# Altium PCB IncuNest_Phototherapy.PcbDoc
Units mm, origin at the board's own origin, x right, y up, seen from the top; angles counter-clockwise.
Board outline 230 x 145 mm, 2 copper layers (Top Layer, Bottom Layer); 100 components, 77 nets, 202 pads, 26 vias.
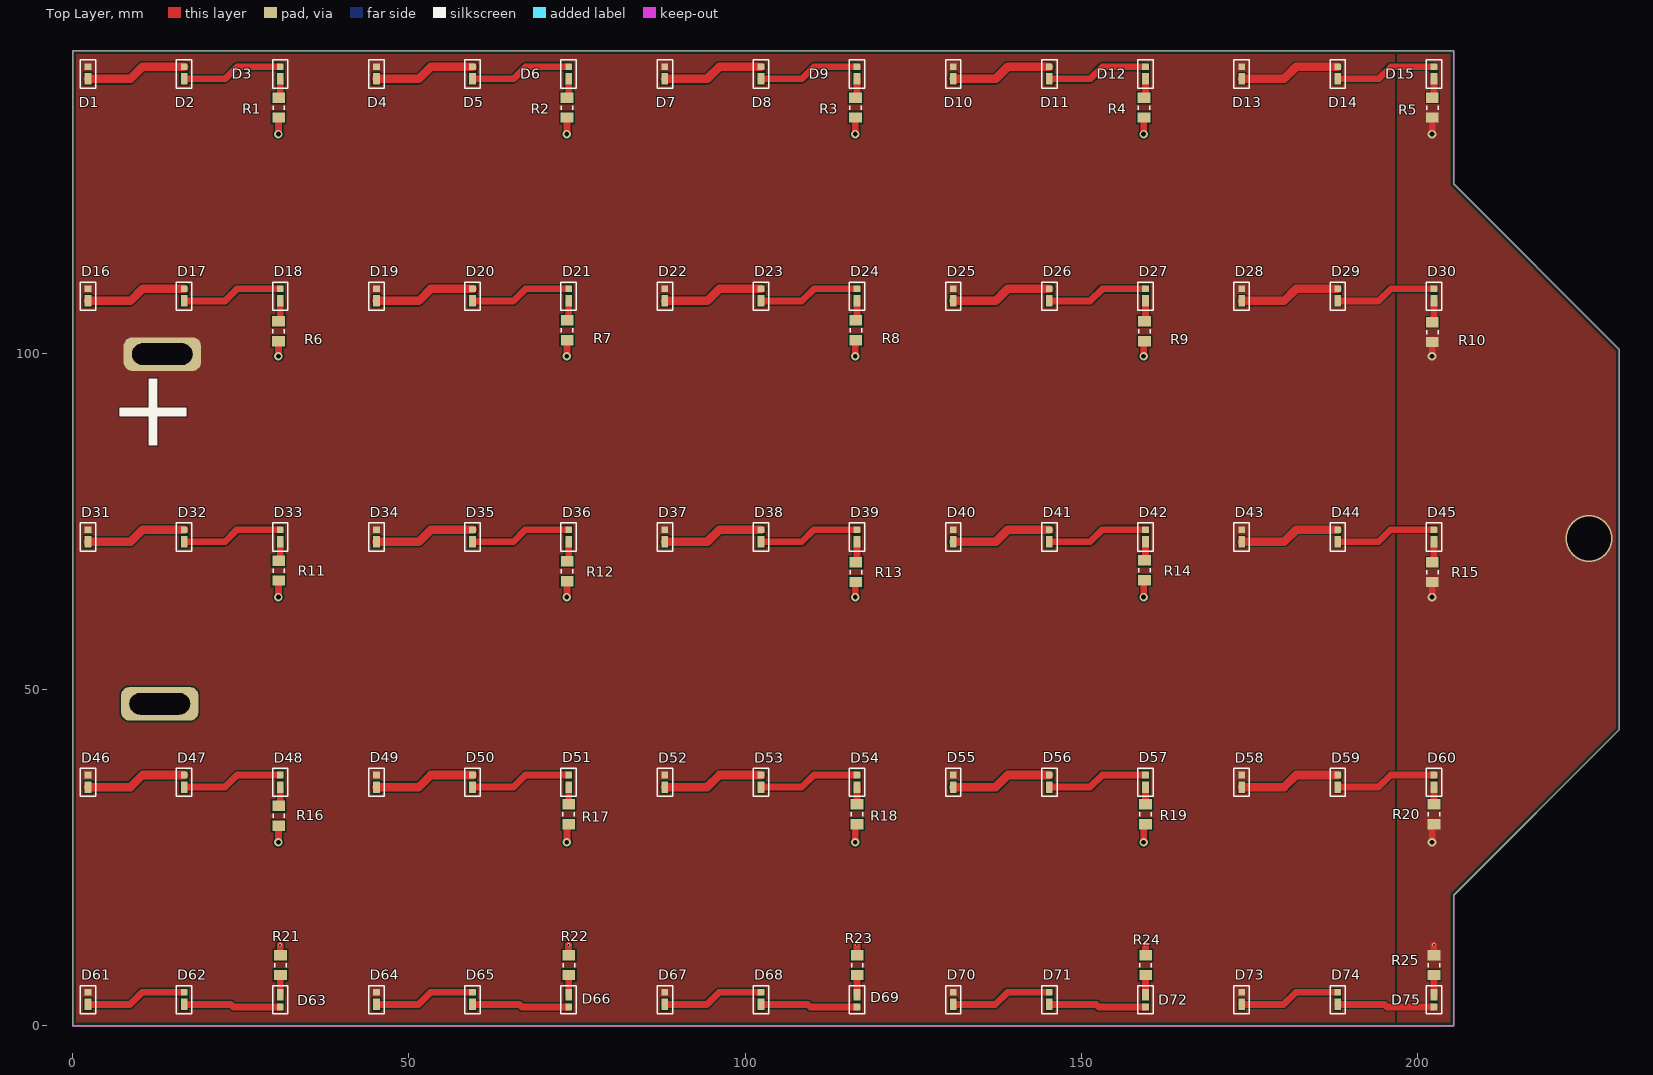
[diagram p0: Top Layer view]
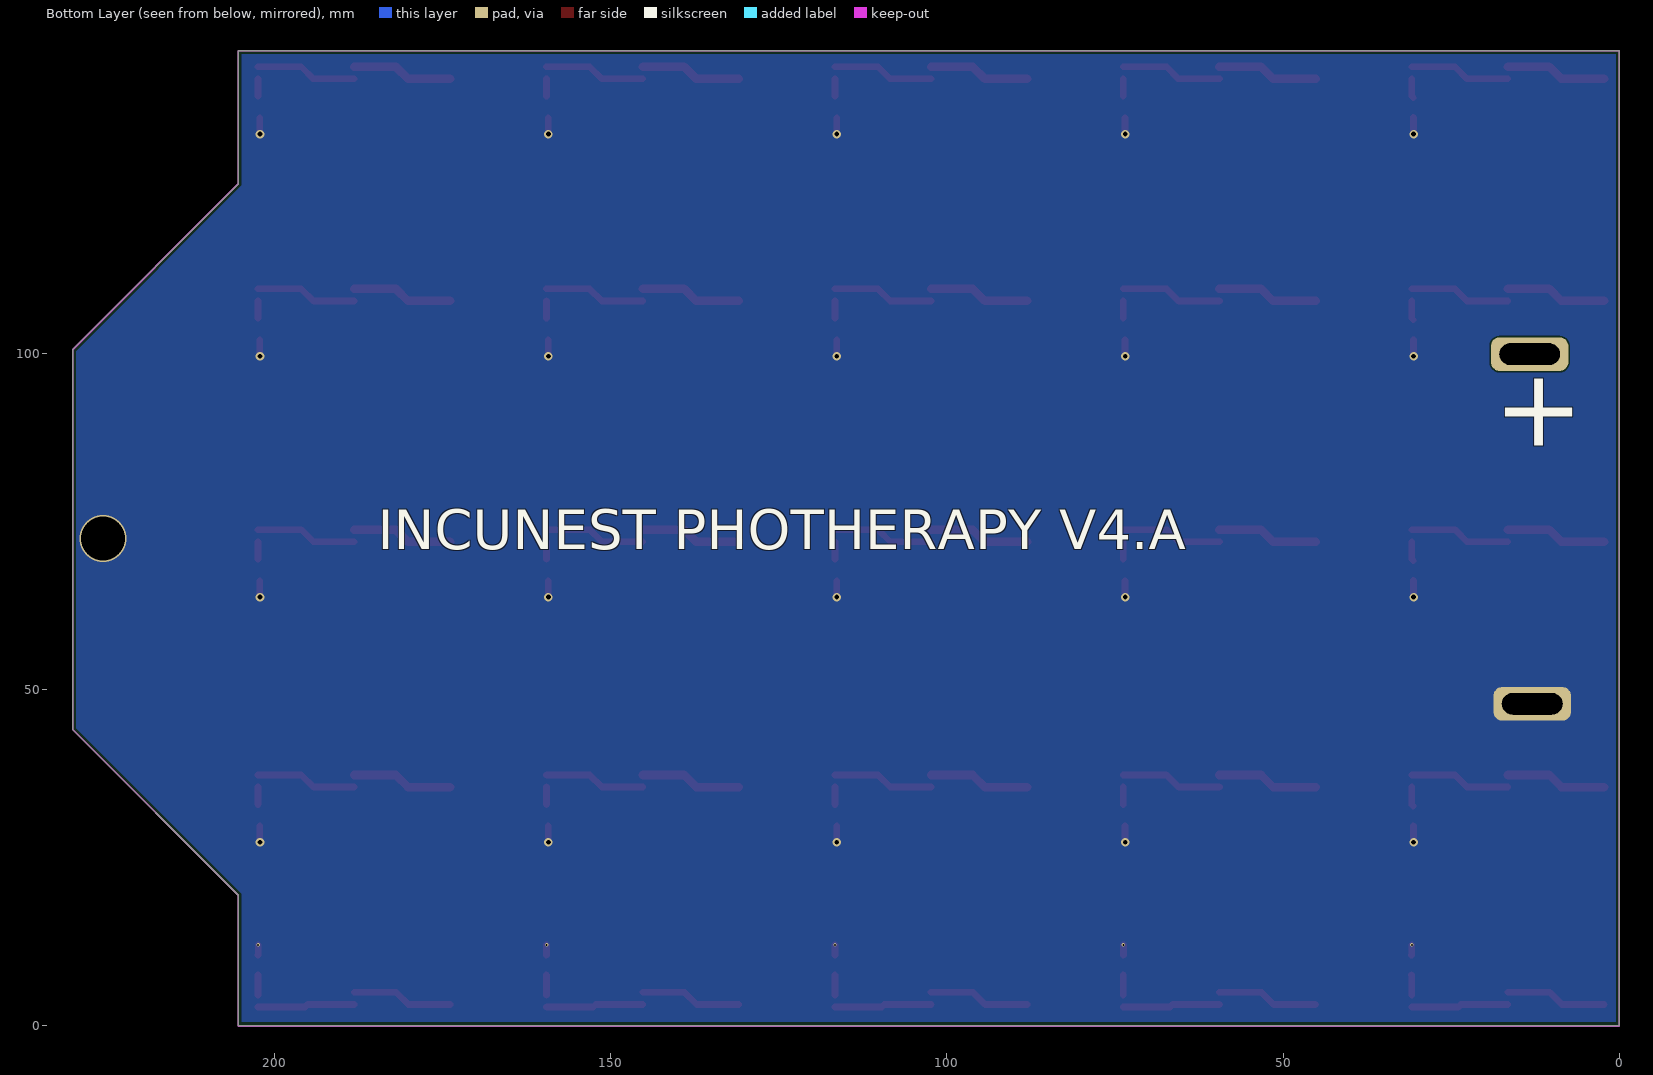
[diagram p1: Bottom Layer view, seen from below]

## Layer stack, top to bottom
Top Solder: solder mask 0.012, FC-001, Dk 4
Top Solder: solder mask 0.0102, Solder Resist, Dk 3.5
Top Layer: signal copper 0.0356
Dielectric 1: dielectric 0.32, FR-4, Dk 4.8
Bottom Layer: signal copper 0.0356
Flex Bottom Coverlay: solder mask 0.0102, Solder Resist, Dk 3.5
Flex Bottom Coverlay: solder mask 0.012, FC-001, Dk 4

## Board outline
0,0 0,145 20.069,145 205.362,145 205.362,125.215 205.362,125.205 230,100.567 230,44.081 205.362,19.443 205.362,0 20.316,0

## Design rules (kind name [scope] priority, off if disabled: settings)
AssemblyTestPointUsage AssemblyTestPointUsage_1 [All] p2:
AssemblyTestpoint AssemblyTestpoint_1 [All] p2: testpointundercomponent=TRUE minsize=1.016 maxsize=2.54 preferedsize=1.524 minholesize=0 maxholesize=1.016 preferedholesize=0.813 testpointgrid=0.025 usegrid=TRUE gridtolerance=0 allowsidetop=TRUE allowsidebottom=TRUE
Clearance "Board outline clearance" [All vs OnLayer('Keep-Out Layer')] p1: gap=0.381 ignorepadtopadclearanceinfootprint=FALSE except(0: Arc-Hole Track-Hole SMDPad-Hole THPad-Hole Via-Hole Fill-Hole Poly-Hole Region-Hole Text-Hole)
Clearance Clearance_1 [All] p2: gap=0.2 ignorepadtopadclearanceinfootprint=FALSE except(0: Arc-Hole Track-Hole SMDPad-Hole THPad-Hole Via-Hole Fill-Hole Poly-Hole Region-Hole Text-Hole; 0.17: SMDPad-SMDPad; 0.254: Track-Via; 0.33: Track-THPad)
ComponentClearance [InComponent('L1')] p1: gap=0 collisioncheckmode=3 verticalgap=0.254 showdistances=FALSE
ComponentClearance UFL [InComponent('RF_CON1')] p2: gap=0 collisioncheckmode=3 verticalgap=0.254 showdistances=FALSE
ComponentClearance ComponentClearance_1 [All] p3: gap=0.254 collisioncheckmode=3 verticalgap=0.254 showdistances=FALSE
DiffPairsRouting [All] p1: maxlimit=0.254 minlimit=0.203 mostfreqgap=0.254 toplayer_minwidth=0.203 toplayer_maxwidth=0.381 toplayer_prefwidth=0.381 bottomlayer_minwidth=0.203 bottomlayer_maxwidth=0.381 bottomlayer_prefwidth=0.381 substack1={523C32A3-E987-4162-AA8D-483919F97A58} toplayer_{523c32a3-e987-4162-aa8d-483919f97a58}_minwidth=0.381 toplayer_{523c32a3-e987-4162-aa8d-483919f97a58}_maxwidth=0.381 toplayer_{523c32a3-e987-4162-aa8d-483919f97a58}_prefwidth=0.381 bottomlayer_{523c32a3-e987-4162-aa8d-483919f97a58}_minwidth=0.381 bottomlayer_{523c32a3-e987-4162-aa8d-483919f97a58}_maxwidth=0.381 bottomlayer_{523c32a3-e987-4162-aa8d-483919f97a58}_prefwidth=0.381 maxuncoupledlength=12.7
DiffPairsRouting DiffPairsRouting_1 [All] p2: maxlimit=0.254 minlimit=0.254 mostfreqgap=0.254 toplayer_minwidth=0.381 toplayer_maxwidth=0.381 toplayer_prefwidth=0.381 bottomlayer_minwidth=0.381 bottomlayer_maxwidth=0.381 bottomlayer_prefwidth=0.381 substack1={523C32A3-E987-4162-AA8D-483919F97A58} toplayer_{523c32a3-e987-4162-aa8d-483919f97a58}_minwidth=0.381 toplayer_{523c32a3-e987-4162-aa8d-483919f97a58}_maxwidth=0.381 toplayer_{523c32a3-e987-4162-aa8d-483919f97a58}_prefwidth=0.381 bottomlayer_{523c32a3-e987-4162-aa8d-483919f97a58}_minwidth=0.381 bottomlayer_{523c32a3-e987-4162-aa8d-483919f97a58}_maxwidth=0.381 bottomlayer_{523c32a3-e987-4162-aa8d-483919f97a58}_prefwidth=0.381 maxuncoupledlength=12.7
FabricationTestPointUsage FabricationTestPointUsage_1 [All] p2: valid=0 allowmultiple=FALSE
FabricationTestpoint FabricationTestpoint_1 [All] p2: side=3 testpointundercomponent=TRUE minsize=1.016 maxsize=2.54 preferedsize=1.524 minholesize=0 maxholesize=1.016 preferedholesize=0.813 testpointgrid=0.025 allowsidetop=TRUE allowsidebottom=TRUE usegrid=TRUE gridtolerance=0
FanoutControl Fanout_LCC [IsLCC] p1: bgadir=Out bgaviamode=Centered fanoutstyle=Auto fanoutdirection=Alternating viagrid=0.025 // Fanout_LCC (Default Rule)
FanoutControl Fanout_BGA [IsBGA] p2: bgadir=Out bgaviamode=Centered fanoutstyle=Auto fanoutdirection=Alternating viagrid=0.025 // Fanout_BGA (Default Rule)
FanoutControl Fanout_Small [(CompPinCount < 5)] p3: bgadir=Out bgaviamode=Centered fanoutstyle=Auto fanoutdirection=OutThenIn viagrid=0.025 // Fanout_Small (Default Rule)
FanoutControl Fanout_SOIC [IsSOIC] p4: bgadir=Out bgaviamode=Centered fanoutstyle=Auto fanoutdirection=Alternating viagrid=0.025 // Fanout_SOIC (Default Rule)
FanoutControl Fanout_BGA_1 [IsBGA] p6: bgadir=Out bgaviamode=Centered fanoutstyle=Auto fanoutdirection=Alternating viagrid=0.025 // Fanout_BGA (Default Rule)
FanoutControl Fanout_LCC_1 [IsLCC] p7: bgadir=Out bgaviamode=Centered fanoutstyle=Auto fanoutdirection=Alternating viagrid=0.025 // Fanout_LCC (Default Rule)
FanoutControl Fanout_SOIC_1 [IsSOIC] p8: bgadir=Out bgaviamode=Centered fanoutstyle=Auto fanoutdirection=Alternating viagrid=0.025 // Fanout_SOIC (Default Rule)
FanoutControl Fanout_Small_1 [(CompPinCount < 5)] p9: bgadir=Out bgaviamode=Centered fanoutstyle=Auto fanoutdirection=OutThenIn viagrid=0.025 // Fanout_Small (Default Rule)
FanoutControl Fanout_Default_1 [All] p10: bgadir=Out bgaviamode=Centered fanoutstyle=Auto fanoutdirection=Alternating viagrid=0.025 // Fanout_Default (Default Rule)
Height Height_1 [All] p1: minheight=0 maxheight=50 prefheight=12.7
HoleSize HoleSize_1 [All] p1: absolutevalues=TRUE maxlimit=15 minlimit=0.2 maxpercent=80.000 minpercent=20.000
HoleToHoleClearance u8 [All vs InComponent('u8_1')] p1: gap=0 allowstackedmicrovias=TRUE
HoleToHoleClearance [All] p2: gap=0.254 allowstackedmicrovias=TRUE
LayerPairs LayerPairs_1 [All] p1: enforce=TRUE
MinimumAnnularRing [All] p1: minimumring=0.1
MinimumSolderMaskSliver MinimumSolderMaskSliver_1 [All] p1 off: minsoldermaskwidth=0.2
NetAntennae NetAntennae_1 [All] p2: netantennaetolerance=0
PasteMaskExpansion PasteMaskExpansion_1 [All] p2: expansion=0
PlaneClearance PlaneClearance_1 [All] p1: clearance=0.508
PlaneConnect PlaneConnect_1 [All] p1: planeconnectstyle=Relief reliefexpansion=0.508 reliefentries=4 reliefconductorwidth=0.7 reliefairgap=0.254
PolygonConnect Power [All] p1: connectstyle=Direct reliefconductorwidth=2.54 reliefentries=4 polygonreliefangle="90 Angle" airgapwidth=0.254
RoutingCorners RoutingCorners_1 [All] p2: cornerstyle=45-Degree minsetback=2.54 maxsetback=2.54
RoutingLayers RoutingLayers_1 [All] p2: top layer_v5=TRUE bottom layer_v5=TRUE
RoutingPriority RoutingPriority_1 [All] p2: routingpriority=0
RoutingTopology RoutingTopology_1 [All] p2: topology=Shortest
RoutingVias RoutingVias_1 [All] p1: holewidth=0.3 width=0.5 viastyle="Through Hole" minholewidth=0.2 minwidth=0.4 maxholewidth=0.711 maxwidth=1.27
ShortCircuit ShortCircuit_Antenna [InNet('NetC10_2')] p1: allowed=TRUE
ShortCircuit ShortCircuit_1 [All] p2: allowed=FALSE
SilkToSilkClearance SilkToSilkClearance_1 [All] p1: silktosilkclearance=0
SilkToSolderMaskClearance SilkToSolderMaskClearance_1 [IsPad] p1: minsilkscreentomaskgap=0 clearancetoexposedcopper=TRUE
SolderMaskExpansion [All] p1: expansion=0.102 istentingtop=FALSE
SolderMaskExpansion SolderMaskExpansion_1 [All] p2: expansion=0.102 istentingtop=FALSE
SupplyNets "Schematic Supply Nets_1" [InNet('12V@2A')] p1: voltage=0.000
SupplyNets "Schematic Supply Nets" [InNet('GND')] p2: voltage=0.000
UnRoutedNet UnRoutedNet_1 [All] p1:
UnpouredPolygon UnpouredPolygon_1 [All] p2:
Width Width_GSM_ANTENNA_1 [InNet('NetC10_2')] p1: maxlimit=0.35 minlimit=0.35 preferedwidth=0.35 substack1={523C32A3-E987-4162-AA8D-483919F97A58}
Width Width_GSM_ANTENNA_2 [InNet('NetC9_2')] p2: maxlimit=0.35 minlimit=0.35 preferedwidth=0.35 substack1={523C32A3-E987-4162-AA8D-483919F97A58}
Width Width_1 [All] p3: maxlimit=8 minlimit=0.1 preferedwidth=0.2 substack1={523C32A3-E987-4162-AA8D-483919F97A58}
13 further rules are at their usual default settings.

## Components (designator, comment, footprint, x,y, rotation, side; value= is the part's Value field where it differs from the comment)
D1 "XL-3014UBC-02" Diode_led 2.289,141.731 r270 top
D2 "XL-3014UBC-02" Diode_led 16.584,141.731 r270 top
D3 "XL-3014UBC-02" Diode_led 30.879,141.731 r270 top
D4 "XL-3014UBC-02" Diode_led 45.174,141.731 r270 top
D5 "XL-3014UBC-02" Diode_led 59.469,141.731 r270 top
D6 "XL-3014UBC-02" Diode_led 73.764,141.731 r270 top
D7 "XL-3014UBC-02" Diode_led 88.059,141.731 r270 top
D8 "XL-3014UBC-02" Diode_led 102.354,141.731 r270 top
D9 "XL-3014UBC-02" Diode_led 116.649,141.731 r270 top
D10 "XL-3014UBC-02" Diode_led 130.944,141.731 r270 top
D11 "XL-3014UBC-02" Diode_led 145.239,141.731 r270 top
D12 "XL-3014UBC-02" Diode_led 159.534,141.731 r270 top
D13 "XL-3014UBC-02" Diode_led 173.829,141.731 r270 top
D14 "XL-3014UBC-02" Diode_led 188.124,141.731 r270 top
D15 "XL-3014UBC-02" Diode_led 202.419,141.731 r270 top
D16 "XL-3014UBC-02" Diode_led 2.289,108.705 r270 top
D17 "XL-3014UBC-02" Diode_led 16.584,108.705 r270 top
D18 "XL-3014UBC-02" Diode_led 30.879,108.705 r270 top
D19 "XL-3014UBC-02" Diode_led 45.174,108.705 r270 top
D20 "XL-3014UBC-02" Diode_led 59.469,108.705 r270 top
D21 "XL-3014UBC-02" Diode_led 73.764,108.705 r270 top
D22 "XL-3014UBC-02" Diode_led 88.059,108.705 r270 top
D23 "XL-3014UBC-02" Diode_led 102.354,108.705 r270 top
D24 "XL-3014UBC-02" Diode_led 116.649,108.705 r270 top
D25 "XL-3014UBC-02" Diode_led 130.944,108.705 r270 top
D26 "XL-3014UBC-02" Diode_led 145.239,108.705 r270 top
D27 "XL-3014UBC-02" Diode_led 159.534,108.705 r270 top
D28 "XL-3014UBC-02" Diode_led 173.829,108.705 r270 top
D29 "XL-3014UBC-02" Diode_led 188.124,108.705 r270 top
D30 "XL-3014UBC-02" Diode_led 202.419,108.705 r270 top
D31 "XL-3014UBC-02" Diode_led 2.289,72.89 r270 top
D32 "XL-3014UBC-02" Diode_led 16.584,72.89 r270 top
D33 "XL-3014UBC-02" Diode_led 30.879,72.89 r270 top
D34 "XL-3014UBC-02" Diode_led 45.174,72.89 r270 top
D35 "XL-3014UBC-02" Diode_led 59.469,72.89 r270 top
D36 "XL-3014UBC-02" Diode_led 73.764,72.89 r270 top
D37 "XL-3014UBC-02" Diode_led 88.059,72.89 r270 top
D38 "XL-3014UBC-02" Diode_led 102.354,72.89 r270 top
D39 "XL-3014UBC-02" Diode_led 116.649,72.89 r270 top
D40 "XL-3014UBC-02" Diode_led 130.944,72.89 r270 top
D41 "XL-3014UBC-02" Diode_led 145.239,72.89 r270 top
D42 "XL-3014UBC-02" Diode_led 159.534,72.89 r270 top
D43 "XL-3014UBC-02" Diode_led 173.829,72.89 r270 top
D44 "XL-3014UBC-02" Diode_led 188.124,72.89 r270 top
D45 "XL-3014UBC-02" Diode_led 202.419,72.89 r270 top
D46 "XL-3014UBC-02" Diode_led 2.289,36.413 r270 top
D47 "XL-3014UBC-02" Diode_led 16.584,36.413 r270 top
D48 "XL-3014UBC-02" Diode_led 30.879,36.413 r270 top
D49 "XL-3014UBC-02" Diode_led 45.174,36.413 r270 top
D50 "XL-3014UBC-02" Diode_led 59.469,36.413 r270 top
D51 "XL-3014UBC-02" Diode_led 73.764,36.413 r270 top
D52 "XL-3014UBC-02" Diode_led 88.059,36.413 r270 top
D53 "XL-3014UBC-02" Diode_led 102.354,36.413 r270 top
D54 "XL-3014UBC-02" Diode_led 116.649,36.413 r270 top
D55 "XL-3014UBC-02" Diode_led 130.944,36.413 r270 top
D56 "XL-3014UBC-02" Diode_led 145.239,36.413 r270 top
D57 "XL-3014UBC-02" Diode_led 159.534,36.413 r270 top
D58 "XL-3014UBC-02" Diode_led 173.829,36.413 r270 top
D59 "XL-3014UBC-02" Diode_led 188.124,36.413 r270 top
D60 "XL-3014UBC-02" Diode_led 202.419,36.413 r270 top
D61 "XL-3014UBC-02" Diode_led 2.289,4.093 r270 top
D62 "XL-3014UBC-02" Diode_led 16.584,4.093 r270 top
D63 "XL-3014UBC-02" Diode_led 30.879,3.712 r90 top
D64 "XL-3014UBC-02" Diode_led 45.174,4.093 r270 top
D65 "XL-3014UBC-02" Diode_led 59.469,4.093 r270 top
D66 "XL-3014UBC-02" Diode_led 73.764,3.712 r90 top
D67 "XL-3014UBC-02" Diode_led 88.059,4.093 r270 top
D68 "XL-3014UBC-02" Diode_led 102.354,4.093 r270 top
D69 "XL-3014UBC-02" Diode_led 116.649,3.712 r90 top
D70 "XL-3014UBC-02" Diode_led 130.944,4.093 r270 top
D71 "XL-3014UBC-02" Diode_led 145.239,4.093 r270 top
D72 "XL-3014UBC-02" Diode_led 159.534,3.712 r90 top
D73 "XL-3014UBC-02" Diode_led 173.829,4.093 r270 top
D74 "XL-3014UBC-02" Diode_led 188.124,4.093 r270 top
D75 "XL-3014UBC-02" Diode_led 202.419,3.712 r90 top
R1 "39R 1206 0.5W 1%" CAPC3216X180X55ML20T25 30.647,136.554 r270 top
R2 "39R 1206 0.5W 1%" CAPC3216X180X55ML20T25 73.532,136.554 r270 top
R3 "39R 1206 0.5W 1%" CAPC3216X180X55ML20T25 116.417,136.554 r270 top
R4 "39R 1206 0.5W 1%" CAPC3216X180X55ML20T25 159.302,136.554 r270 top
R5 "39R 1206 0.5W 1%" CAPC3216X180X55ML20T25 202.187,136.554 r270 top
R6 "39R 1206 0.5W 1%" CAPC3216X180X55ML20T25 30.61,103.3 r270 top
R7 "39R 1206 0.5W 1%" CAPC3216X180X55ML20T25 73.536,103.427 r270 top
R8 "39R 1206 0.5W 1%" CAPC3216X180X55ML20T25 116.462,103.427 r270 top
R9 "39R 1206 0.5W 1%" CAPC3216X180X55ML20T25 159.388,103.3 r270 top
R10 "39R 1206 0.5W 1%" CAPC3216X180X55ML20T25 202.187,103.173 r270 top
R11 "39R 1206 0.5W 1%" CAPC3216X180X55ML20T25 30.647,67.713 r270 top
R12 "39R 1206 0.5W 1%" CAPC3216X180X55ML20T25 73.536,67.613 r270 top
R13 "39R 1206 0.5W 1%" CAPC3216X180X55ML20T25 116.462,67.486 r270 top
R14 "39R 1206 0.5W 1%" CAPC3216X180X55ML20T25 159.388,67.74 r270 top
R15 "39R 1206 0.5W 1%" CAPC3216X180X55ML20T25 202.187,67.486 r270 top
R16 "39R 1206 0.5W 1%" CAPC3216X180X55ML20T25 30.647,31.236 r270 top
R17 "39R 1206 0.5W 1%" CAPC3216X180X55ML20T25 73.764,31.468 r270 top
R18 "39R 1206 0.5W 1%" CAPC3216X180X55ML20T25 116.649,31.468 r270 top
R19 "39R 1206 0.5W 1%" CAPC3216X180X55ML20T25 159.534,31.468 r270 top
R20 "39R 1206 0.5W 1%" CAPC3216X180X55ML20T25 202.419,31.468 r270 top
R21 "39R 1206 0.5W 1%" CAPC3216X180X55ML20T25 30.901,9.046 r90 top
R22 "39R 1206 0.5W 1%" CAPC3216X180X55ML20T25 73.786,9.046 r90 top
R23 "39R 1206 0.5W 1%" CAPC3216X180X55ML20T25 116.671,9.046 r90 top
R24 "39R 1206 0.5W 1%" CAPC3216X180X55ML20T25 159.556,9.046 r90 top
R25 "39R 1206 0.5W 1%" CAPC3216X180X55ML20T25 202.441,9.046 r90 top

## Footprints (in the part's own frame and the unit in brackets; to place one, negate y for a bottom-side part, rotate by r counter-clockwise, add the part's x,y. Pads: shape width x height; smd on the part's side, far side on the other; paste and mask are expansions set on the pad)
CAPC3216X180X55ML20T25 [mm]
  rect 1.55x1.9 smd: 1(-1.475,0) 2(1.475,0)
  silkscreen extent -0.3,-0.85 0.3,0.85, body extent -1.7,-0.9 1.7,0.9, height 1.8
Diode_led [mm]
  rect 1x1 smd: 1(-0.9,0)
  rect 1.7x1 smd: 2(0.9,0)
  silkscreen extent -1.91,-1.14 2.29,1.14

## Part data
D1 D2 D3 D4 D5 D6 D7 D8 D9 D10 D11 D12 D13 D14 D15 D16 D17 D18 D19 D20 D21 D22 D23 D24 D25 D26 D27 D28 D29 D30 D31 D32 D33 D34 D35 D36 D37 D38 D39 D40 D41 D42 D43 D44 D45 D46 D47 D48 D49 D50 D51 D52 D53 D54 D55 D56 D57 D58 D59 D60 D61 D62 D63 D64 D65 D66 D67 D68 D69 D70 D71 D72 D73 D74 D75: library part CMP-05535-000002-1, "LED GREEN ESS II SMD", Ambient Temperature Range High=+85°C, Ambient Temperature Range Low=-30°C, Colour=Green, Forward Current=5mA, Forward Voltage=1.95V, LCSC_PN=C2843789, Manufacturer=Panasonic, Manufacturer Part Number=LNJ337W83RA, Power Dissipation=55mW, Reverse Voltage=4V, Temperature="-30°C to +85°C", Automotive=No, Category=Diode, ComponentLink2Description=Datasheet, ComponentLink2URL=https://industrial.panasonic.com/content/data/SC/ds/ds4/LNJ337W83RA_E.pdf, Device Class L1=Optoelectronics, Device Class L2=LEDs, Device Class L3=unset, Digikey Description="LED GREEN ESS II SMD", Height=0.25mm, Lead Free=Yes, Led Orientation="Top View", Luminous Intensity=7.5mcd, Mouser Description="LNJ337W83RA; ESS II Series Yellow-Green LED; 572 nm 1608(0603); Rectangle Lens", Obsolete Part=true, Octopart=https://octopart.com/lnj337w83ra-panasonic-44404387, Package=LNJ337W83RA, Peak Emmision Wavelength=575nm, RoHS=TRUE, Temperature Range High=+85°C, Temperature Range Low=-30°C, Wavelength=572nm
R1 R2 R3 R4 R5 R6 R7 R8 R9 R10 R11 R12 R13 R14 R15 R16 R17 R18 R19 R20 R21 R22 R23 R24 R25: library part CMP-0abdc173b10ad57a-1, Case/Package=1206, LCSC_PN=C137295, Manufacturer Part Number=WSLP12065L000FEA, Manufacturer Part Number 2=FMF06FTHR005-LHL, Power=1W, Resistance=0,002, Lifecycle Status="Not Listed by Manufacturer", Octopart URL=https://octopart.com/1-2176055-0-te+connectivity-46440145, OctopartID=0abdc173b10ad57a, OrderingCode=WSLP12065L000FEA, Packaging="Tape & Reel (TR)"

## Free pads (board coordinates)
  rrect50% 11.5x5 hole 3.2 slot 9 at 0 deg: 0(12.957,47.897) 0(13.338,99.897)

## Via types
v1: diameter 1.27, hole 0.711, Top Layer to Bottom Layer, tented both sides, 20 vias
v2: diameter 0.5, hole 0.3, Top Layer to Bottom Layer, 5 vias
v3: diameter 7, hole 6.5, Top Layer to Bottom Layer, tented both sides, 1 vias

## Nets (pads, with @x,y where several pads share a name; then routed paths per layer and width w, separated by ;. In a path a pad name is that pad's centre, name@x,y a point inside that pad or via, vN(x,y) a via of type N, cw(c..) or ccw(c..) an arc to the next point about the centre after c; other vN are vias at no path point)
12V@2A: D1.1 D4.1 D7.1 D10.1 D13.1 D16.1 D19.1 D22.1 D25.1 D28.1 D31.1 D34.1 D37.1 D40.1 D43.1 D46.1 D49.1 D52.1 D55.1 D58.1 D61.1 D64.1 D67.1 D70.1 D73.1 pad.0@13.338,99.897
GND: pad.0@12.957,47.897 R1.2 R2.2 R3.2 R4.2 R5.2 R6.2 R7.2 R8.2 R9.2 R10.2 R11.2 R12.2 R13.2 R14.2 R15.2 R16.2 R17.2 R18.2 R19.2 R20.2 R21.2 R22.2 R23.2 R24.2 R25.2 | length 56.3
  Top Layer w1: v1(30.598,27.299) 30.623,27.323 30.623,29.737 R16.2 ; v1(30.598,63.776) 30.623,63.8 30.623,66.214 R11.2 ; v1(30.598,99.591) 30.623,99.616 30.623,102.029 R6.2@30.647,102.053 ; v1(30.598,132.617) 30.623,132.642 30.623,135.055 R1.2 ; v2(30.864,12.065) 30.864,10.558 R21.2 ; v1@73.508,27.323 R17.2@73.508,29.737 ; v1@73.508,63.8 R12.2@73.508,66.214 ; v1@73.508,99.616 R7.2@73.508,102.029 ; v1@73.508,132.642 R2.2@73.508,135.055 ; v2(73.749,12.065) 73.749,10.558 R22.2 ; v1@116.393,27.323 R18.2@116.393,29.737 ; v1@116.393,63.8 R13.2@116.393,66.214 ; v1@116.393,99.616 R8.2@116.393,102.029 ; v1@116.392,132.642 R3.2@116.392,135.055 ; v2(116.634,12.065) 116.634,10.558 R23.2 ; v1@159.278,27.323 R19.2@159.278,29.737 ; v1@159.278,63.8 R14.2@159.278,66.214 ; v1@159.278,99.616 R9.2@159.278,102.029 ; v1@159.277,132.642 R4.2@159.277,135.055 ; v2(159.519,12.065) 159.519,10.558 R24.2 ; v1@202.163,27.323 R20.2@202.163,29.737 ; v1@202.163,63.8 R15.2@202.163,66.214 ; v1@202.163,99.616 R10.2@202.163,102.029 ; v1@202.162,132.642 R5.2@202.162,135.055 ; v2(202.404,12.065) 202.404,10.558 R25.2
  other v1: 73.483,27.299 116.368,27.299 159.253,27.299 202.138,27.299 73.483,63.776 116.368,63.776 159.253,63.776 202.138,63.776 73.483,99.591 116.368,99.591 159.253,99.591 202.138,99.591 73.483,132.617 116.368,132.617 159.253,132.617 202.138,132.617
  other v3: 225.483,72.483
NetD1_2: D1.2 D2.1 | length 15
  Top Layer w1.27: D1.2 8.604,140.831 10.404,142.631 D2.1
NetD2_2: D2.2 D3.1 | length 15
  Top Layer w1: D2.2 22.657,140.831 24.457,142.631 D3.1
NetD3_2: D3.2 R1.1 | length 2.9
  Top Layer w1: R1.1 30.879,138.261 D3.2
NetD4_2: D4.2 D5.1 | length 15
  Top Layer w1.27: D4.2 51.489,140.831 53.289,142.631 D5.1
NetD5_2: D5.2 D6.1 | length 15
  Top Layer w1: D5.2 65.542,140.831 67.342,142.631 D6.1
NetD6_2: D6.2 R2.1 | length 2.6
  Top Layer w1: R2.1@73.764,138.261 D6.2
NetD7_2: D7.2 D8.1 | length 15
  Top Layer w1.27: D7.2 94.374,140.831 96.174,142.631 D8.1
NetD8_2: D8.2 D9.1 | length 15
  Top Layer w1: D8.2 108.426,140.831 110.226,142.631 D9.1
NetD9_2: D9.2 R3.1 | length 2.6
  Top Layer w1: R3.1@116.649,138.261 D9.2
NetD10_2: D10.2 D11.1 | length 15
  Top Layer w1.27: D10.2 137.259,140.831 139.059,142.631 D11.1
NetD11_2: D11.2 D12.1 | length 15
  Top Layer w1: D11.2 151.311,140.831 153.111,142.631 D12.1
NetD12_2: D12.2 R4.1 | length 2.6
  Top Layer w1: R4.1@159.534,138.261 D12.2
NetD13_2: D13.2 D14.1 | length 15
  Top Layer w1.27: D13.2 180.144,140.831 181.944,142.631 D14.1
NetD14_2: D14.2 D15.1 | length 15
  Top Layer w1: D14.2 194.196,140.831 195.996,142.631 D15.1
NetD15_2: D15.2 R5.1 | length 2.6
  Top Layer w1: R5.1@202.419,138.261 D15.2
NetD16_2: D16.2 D17.1 | length 15
  Top Layer w1.27: D16.2 8.604,107.805 10.404,109.605 D17.1
NetD17_2: D17.2 D18.1 | length 15
  Top Layer w1: D17.2 22.657,107.805 24.457,109.605 D18.1
NetD18_2: D18.2 R6.1 | length 2.9
  Top Layer w1: R6.1@30.647,105.003 30.879,105.235 D18.2
NetD19_2: D19.2 D20.1 | length 15
  Top Layer w1.27: D19.2 51.489,107.805 53.289,109.605 D20.1
NetD20_2: D20.2 D21.1 | length 15
  Top Layer w1: D20.2 65.542,107.805 67.342,109.605 D21.1
NetD21_2: D21.2 R7.1 | length 2.6
  Top Layer w1: R7.1@73.764,105.235 D21.2
NetD22_2: D22.2 D23.1 | length 15
  Top Layer w1.27: D22.2 94.374,107.805 96.174,109.605 D23.1
NetD23_2: D23.2 D24.1 | length 15
  Top Layer w1: D23.2 108.427,107.805 110.227,109.605 D24.1
NetD24_2: D24.2 R8.1 | length 2.6
  Top Layer w1: R8.1@116.649,105.235 D24.2
NetD25_2: D25.2 D26.1 | length 15
  Top Layer w1.27: D25.2 137.259,107.805 139.059,109.605 D26.1
NetD26_2: D26.2 D27.1 | length 15
  Top Layer w1: D26.2 151.312,107.805 153.112,109.605 D27.1
NetD27_2: D27.2 R9.1 | length 2.6
  Top Layer w1: R9.1@159.534,105.235 D27.2
NetD28_2: D28.2 D29.1 | length 15
  Top Layer w1.27: D28.2 180.144,107.805 181.944,109.605 D29.1
NetD29_2: D29.2 D30.1 | length 15
  Top Layer w1: D29.2 194.197,107.805 195.997,109.605 D30.1
NetD30_2: D30.2 R10.1 | length 2.6
  Top Layer w1: R10.1@202.419,105.235 D30.2
NetD31_2: D31.2 D32.1 | length 15
  Top Layer w1.27: D31.2 8.604,71.99 10.404,73.79 D32.1
NetD32_2: D32.2 D33.1 | length 15
  Top Layer w1: D32.2 22.657,71.99 24.457,73.79 D33.1
NetD33_2: D33.2 R11.1 | length 2.9
  Top Layer w1: R11.1 30.879,69.42 D33.2
NetD34_2: D34.2 D35.1 | length 15
  Top Layer w1.27: D34.2 51.489,71.99 53.289,73.79 D35.1
NetD35_2: D35.2 D36.1 | length 15
  Top Layer w1: D35.2 65.542,71.99 67.342,73.79 D36.1
NetD36_2: D36.2 R12.1 | length 2.6
  Top Layer w1: R12.1@73.764,69.42 D36.2
NetD37_2: D37.2 D38.1 | length 15
  Top Layer w1.27: D37.2 94.374,71.99 96.174,73.79 D38.1
NetD38_2: D38.2 D39.1 | length 15
  Top Layer w1: D38.2 108.427,71.99 110.227,73.79 D39.1
NetD39_2: D39.2 R13.1 | length 2.6
  Top Layer w1: R13.1@116.649,69.42 D39.2
NetD40_2: D40.2 D41.1 | length 15
  Top Layer w1.27: D40.2 137.259,71.99 139.059,73.79 D41.1
NetD41_2: D41.2 D42.1 | length 15
  Top Layer w1: D41.2 151.312,71.99 153.112,73.79 D42.1
NetD42_2: D42.2 R14.1 | length 2.6
  Top Layer w1: R14.1@159.534,69.42 D42.2
NetD43_2: D43.2 D44.1 | length 15
  Top Layer w1.27: D43.2 180.144,71.99 181.944,73.79 D44.1
NetD44_2: D44.2 D45.1 | length 15
  Top Layer w1: D44.2 194.197,71.99 195.997,73.79 D45.1
NetD45_2: D45.2 R15.1 | length 2.6
  Top Layer w1: R15.1@202.419,69.42 D45.2
NetD46_2: D46.2 D47.1 | length 15
  Top Layer w1.27: D46.2 8.604,35.513 10.404,37.313 D47.1
NetD47_2: D47.2 D48.1 | length 15
  Top Layer w1: D47.2 22.657,35.513 24.457,37.313 D48.1
NetD48_2: D48.2 R16.1 | length 2.9
  Top Layer w1: R16.1 30.879,32.943 D48.2
NetD49_2: D49.2 D50.1 | length 15
  Top Layer w1.27: D49.2 51.489,35.513 53.289,37.313 D50.1
NetD50_2: D50.2 D51.1 | length 15
  Top Layer w1: D50.2 65.542,35.513 67.342,37.313 D51.1
NetD51_2: D51.2 R17.1 | length 2.6
  Top Layer w1: R17.1 D51.2
NetD52_2: D52.2 D53.1 | length 15
  Top Layer w1.27: D52.2 94.374,35.513 96.174,37.313 D53.1
NetD53_2: D53.2 D54.1 | length 15
  Top Layer w1: D53.2 108.427,35.513 110.227,37.313 D54.1
NetD54_2: D54.2 R18.1 | length 2.6
  Top Layer w1: R18.1 D54.2
NetD55_2: D55.2 D56.1 | length 15
  Top Layer w1.27: D55.2 137.259,35.513 139.059,37.313 D56.1
NetD56_2: D56.2 D57.1 | length 15
  Top Layer w1: D56.2 151.312,35.513 153.112,37.313 D57.1
NetD57_2: D57.2 R19.1 | length 2.6
  Top Layer w1: R19.1 D57.2
NetD58_2: D58.2 D59.1 | length 15
  Top Layer w1.27: D58.2 180.144,35.513 181.944,37.313 D59.1
NetD59_2: D59.2 D60.1 | length 15
  Top Layer w1: D59.2 194.197,35.513 195.997,37.313 D60.1
NetD60_2: D60.2 R20.1 | length 2.6
  Top Layer w1: R20.1 D60.2
NetD61_2: D61.2 D62.1 | length 15
  Top Layer w1: D61.2 8.537,3.193 10.337,4.993 D62.1
NetD62_2: D62.2 D63.1 | length 14.5
  Top Layer w1: D62.2 23.541,3.193 23.922,2.812 D63.1
NetD63_2: D63.2 R21.1 | length 3
  Top Layer w1: D63.2 30.879,7.549 R21.1
NetD64_2: D64.2 D65.1 | length 15
  Top Layer w1: D64.2 51.422,3.193 53.222,4.993 D65.1
NetD65_2: D65.2 D66.1 | length 14.5
  Top Layer w1: D65.2 66.426,3.193 66.807,2.812 D66.1
NetD66_2: D66.2 R22.1 | length 3
  Top Layer w1: D66.2 73.764,7.549 R22.1
NetD67_2: D67.2 D68.1 | length 15
  Top Layer w1: D67.2 94.306,3.193 96.106,4.993 D68.1
NetD68_2: D68.2 D69.1 | length 14.5
  Top Layer w1: D68.2 109.311,3.193 109.692,2.812 D69.1
NetD69_2: D69.2 R23.1 | length 3
  Top Layer w1: D69.2 116.649,7.549 R23.1
NetD70_2: D70.2 D71.1 | length 15
  Top Layer w1: D70.2 137.191,3.193 138.991,4.993 D71.1
NetD71_2: D71.2 D72.1 | length 14.5
  Top Layer w1: D71.2 152.196,3.193 152.577,2.812 D72.1
NetD72_2: D72.2 R24.1 | length 3
  Top Layer w1: D72.2 159.534,7.549 R24.1
NetD73_2: D73.2 D74.1 | length 15
  Top Layer w1: D73.2 180.076,3.193 181.876,4.993 D74.1
NetD74_2: D74.2 D75.1 | length 14.5
  Top Layer w1: D74.2 195.081,3.193 195.462,2.812 D75.1
NetD75_2: D75.2 R25.1 | length 3
  Top Layer w1: D75.2 202.419,7.549 R25.1

## Polygon pours and split planes (outlines as drawn)
GND on Bottom Layer "12V@2A" (solid, remove dead copper, pour order 7): -6.728,144.519 -6.728,0.628 233.392,0.628 233.392,144.519
GND on Top Layer "GND_L01_P008" (solid, remove dead copper, pour order 8): 196.98,145 196.98,0 239.398,0 239.398,145
12V@2A on Top Layer "12V@2A_L01_P006" (solid, remove dead copper, pour order 6): 196.599,144.773 -6.728,144.773 -6.728,0.501 196.599,0.501

## Keep-outs
Keep-Out Layer:
  lines w0.254: 205.362,-0.007 205.362,19.443 230,44.081 230,100.567 205.362,125.205 205.362,125.215 205.362,145.027 ; 205.362,0 20.316,0 0,0 0,145 20.069,145 205.362,145 ; 205.362,145.027 205.362,145.027

## Silkscreen, mask and mechanical layers (free items; w line width, h text height)
Flex Top Overlay:
  text "+" at 18.672,82.406 h20
  text "-" at 22.355,63.991 h40 r90
Bottom Overlay:
  text "+" at 18.672,82.406 h20
  text "INCUNEST PHOTHERAPY V4.A" at 184.661,68.954 h10.16
  text "-" at 22.355,63.991 h40 r90